# Altium PCB trottinette_telemetrie_PCB ASCII REV 2.00.PcbDoc
Units mm, origin at the board's own origin, x right, y up, seen from the top; angles counter-clockwise.
Board outline 53 x 36.25 mm, 2 copper layers (Top, Bottom), stack 1.54 mm thick; 49 components, 43 nets, 221 pads, 70 vias.
Unrouted connection lines stored in the file: 1.
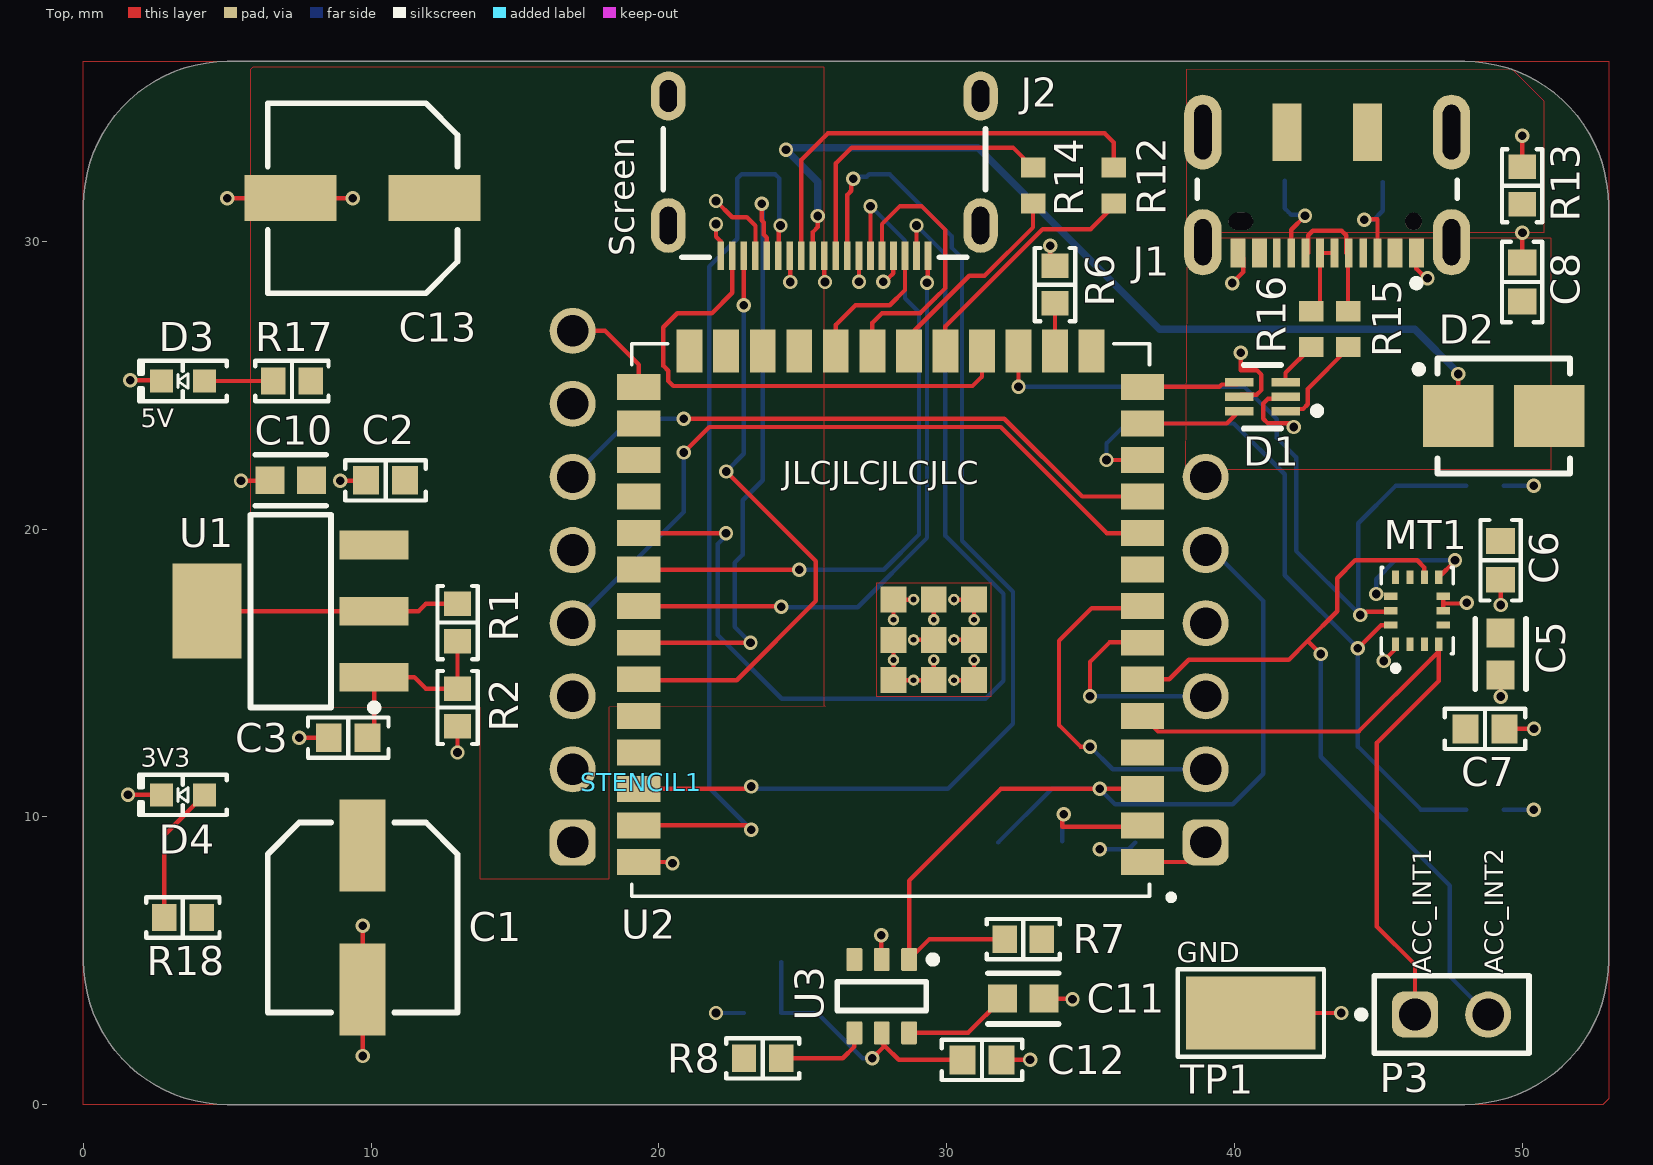
[diagram p0: Top view]
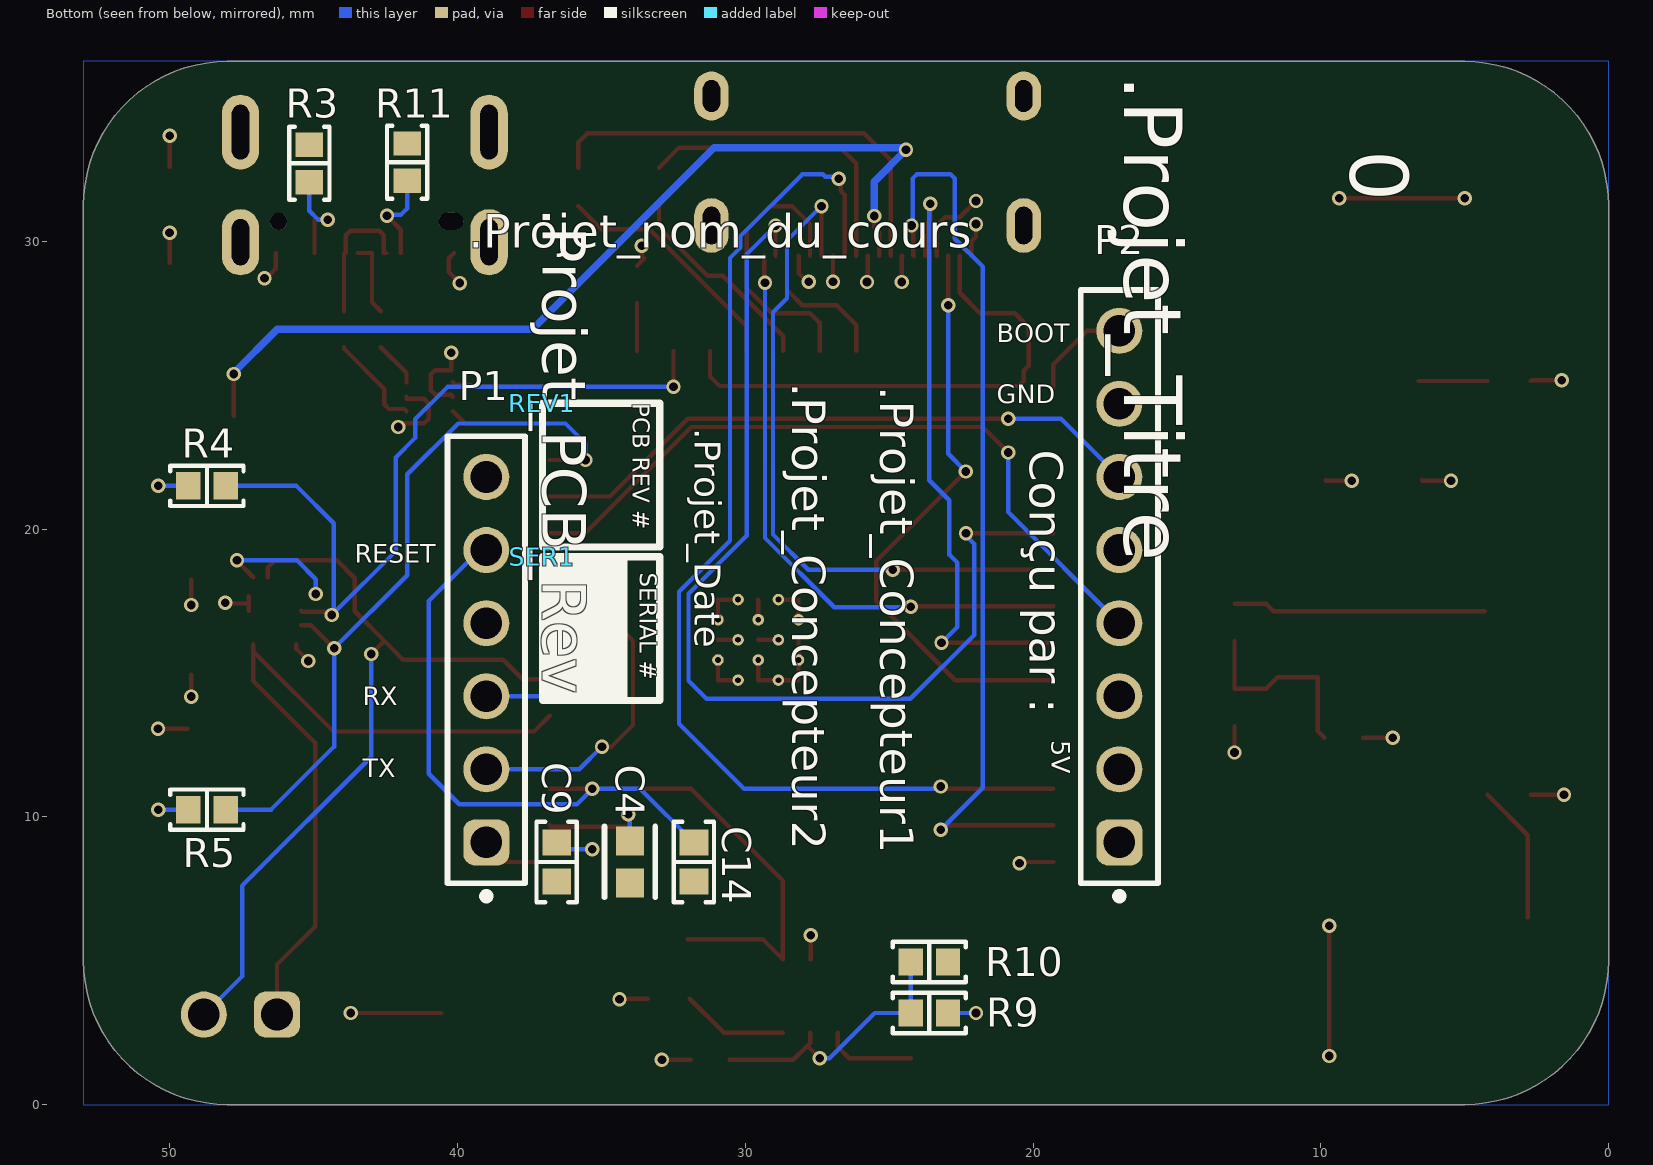
[diagram p1: Bottom view, seen from below]

## Layer stack, top to bottom
Top Solder: solder mask 0.0102, Solder Resist, Dk 3.5
Top: signal copper 0.035
Dielectric 1: core 1.47, FR-4, Dk 4.6
Bottom: signal copper 0.035
Bottom Solder: solder mask 0.0102, Solder Resist, Dk 3.5

## Board outline
0,5 0,31.25 cw(c5,31.25) 5,36.25 48,36.25 cw(c48,31.25) 53,31.25 53,5 cw(c48,5) 48,0 5,0 cw(c5,5)

## Design rules (kind name [scope] priority, off if disabled: settings)
AssemblyTestPointUsage [All] p0: scope1count=1 scope1_0_kind=Board scope1_0_value=Board scope2count=1 scope2_0_kind=Board scope2_0_value=Board commentlength=0
AssemblyTestpoint [All] p0: scope1count=1 scope1_0_kind=Board scope1_0_value=Board scope2count=1 scope2_0_kind=Board scope2_0_value=Board commentlength=0
BoardOutlineClearance [All] p0: scope1count=1 scope1_0_kind=Board scope1_0_value=Board scope2count=1 scope2_0_kind=Board scope2_0_value=Board commentlength=0 gap=0.2
BoardOutlineClearance [All] p1: gap=0.2 ignorepadtopadclearanceinfootprint=FALSE except(0: Arc-SplitContinuation Track-SplitContinuation SMDPad-SplitContinuation THPad-SplitContinuation Via-SplitContinuation Fill-SplitContinuation Poly-SplitContinuation Region-SplitContinuation Text-SplitContinuation)
Clearance [All] p0: scope1count=1 scope1_0_kind=Board scope1_0_value=Board scope2count=1 scope2_0_kind=Board scope2_0_value=Board commentlength=0 gap=0.152
Clearance [All] p1: gap=0.152 ignorepadtopadclearanceinfootprint=FALSE except(0: Arc-Hole Track-Hole SMDPad-Hole THPad-Hole Via-Hole Fill-Hole Poly-Hole Region-Hole Text-Hole; 0.127: Arc-Arc Arc-Track Track-Track SMDPad-Fill SMDPad-Poly SMDPad-Region; 0.2: Arc-SMDPad Track-SMDPad; 0.254: Arc-Via Track-Via Via-Via; 0.33: Arc-THPad Track-THPad; 0.5: THPad-THPad)
ComponentClearance [All] p0: scope1count=1 scope1_0_kind=Board scope1_0_value=Board scope2count=1 scope2_0_kind=Board scope2_0_value=Board commentlength=0 gap=0.102 collisioncheckmode=3
ComponentClearance "Schematic Component Clearance Constraint" [All] p0: scope1count=1 scope1_0_kind=Component scope1_0_value=REV1 scope2count=1 scope2_0_kind=Board scope2_0_value=Board commentlength=0 gap=0 collisioncheckmode=3
ComponentClearance "Schematic Component Clearance Constraint_1" [All] p0: scope1count=1 scope1_0_kind=Component scope1_0_value=SER1 scope2count=1 scope2_0_kind=Board scope2_0_value=Board commentlength=0 gap=0 collisioncheckmode=3
ComponentClearance "Schematic Component Clearance Constraint_1" [InComponent('SER1')] p1: gap=0 collisioncheckmode=3 verticalgap=0 showdistances=FALSE
ComponentClearance "Schematic Component Clearance Constraint" [InComponent('REV1')] p2: gap=0 collisioncheckmode=3 verticalgap=0 showdistances=FALSE
ComponentClearance [All] p3: gap=0.102 collisioncheckmode=3 verticalgap=0.102 showdistances=FALSE
DiffPairsRouting [All] p0: scope1count=1 scope1_0_kind=Board scope1_0_value=Board scope2count=1 scope2_0_kind=Board scope2_0_value=Board commentlength=0
FabricationTestPointUsage [All] p0: scope1count=1 scope1_0_kind=Board scope1_0_value=Board scope2count=1 scope2_0_kind=Board scope2_0_value=Board commentlength=0 valid=0 allowmultiple=FALSE
FabricationTestpoint [All] p0: scope1count=1 scope1_0_kind=Board scope1_0_value=Board scope2count=1 scope2_0_kind=Board scope2_0_value=Board commentlength=0 side=3 testpointundercomponent=TRUE minsize=1.016 maxsize=2.54 preferedsize=1.524 minholesize=0 maxholesize=1.016 preferedholesize=0.813 testpointgrid=0.025
FanoutControl Fanout_Default [All] p0: scope1count=1 scope1_0_kind=Board scope1_0_value=Board scope2count=1 scope2_0_kind=Board scope2_0_value=Board commentlength=30 // Fanout_Default (Default Rule)
FanoutControl Fanout_Small [All] p0 off: scope1count=1 scope1_0_kind=Board scope1_0_value=Board scope2count=1 scope2_0_kind=Board scope2_0_value=Board commentlength=84 // Protel DXP Scope 1 Expression Was: (CompPinCount < 5)   Fanout_Small (Default Rule)
FanoutControl Fanout_SOIC [All] p0 off: scope1count=1 scope1_0_kind=Board scope1_0_value=Board scope2count=1 scope2_0_kind=Board scope2_0_value=Board commentlength=71 // Protel DXP Scope 1 Expression Was: IsSOIC   Fanout_SOIC (Default Rule)
FanoutControl Fanout_LCC [All] p0 off: scope1count=1 scope1_0_kind=Board scope1_0_value=Board scope2count=1 scope2_0_kind=Board scope2_0_value=Board commentlength=69 // Protel DXP Scope 1 Expression Was: IsLCC   Fanout_LCC (Default Rule)
FanoutControl Fanout_BGA [All] p0 off: scope1count=1 scope1_0_kind=Board scope1_0_value=Board scope2count=1 scope2_0_kind=Board scope2_0_value=Board commentlength=69 // Protel DXP Scope 1 Expression Was: IsBGA   Fanout_BGA (Default Rule)
Height [All] p0: scope1count=1 scope1_0_kind=Board scope1_0_value=Board scope2count=1 scope2_0_kind=Board scope2_0_value=Board commentlength=0
HoleSize [All] p0: scope1count=1 scope1_0_kind=Board scope1_0_value=Board scope2count=1 scope2_0_kind=Board scope2_0_value=Board commentlength=0 absolutevalues=TRUE maxlimit=6.3 minlimit=0.3 maxpercent=80.000 minpercent=20.000
HoleSize [All] p1: absolutevalues=TRUE maxlimit=6.3 minlimit=0.3 maxpercent=80.000 minpercent=20.000
HoleToHoleClearance [All] p0: scope1count=1 scope1_0_kind=Board scope1_0_value=Board scope2count=1 scope2_0_kind=Board scope2_0_value=Board commentlength=0
HoleToHoleClearance [All] p1: gap=0.5 allowstackedmicrovias=FALSE
LayerPairs [All] p0: scope1count=1 scope1_0_kind=Board scope1_0_value=Board scope2count=1 scope2_0_kind=Board scope2_0_value=Board commentlength=0 enforce=TRUE
MinimumAnnularRing [All] p0: scope1count=1 scope1_0_kind=Board scope1_0_value=Board scope2count=1 scope2_0_kind=Board scope2_0_value=Board commentlength=0 minimumring=0.13
MinimumAnnularRing [All] p1: minimumring=0.13
MinimumSolderMaskSliver [All] p0: scope1count=1 scope1_0_kind=Board scope1_0_value=Board scope2count=1 scope2_0_kind=Board scope2_0_value=Board commentlength=0
MinimumSolderMaskSliver [All] p1: minsoldermaskwidth=0.1
NetAntennae [All] p0: scope1count=1 scope1_0_kind=Board scope1_0_value=Board scope2count=1 scope2_0_kind=Board scope2_0_value=Board commentlength=0
PasteMaskExpansion [All] p0: scope1count=1 scope1_0_kind=Board scope1_0_value=Board scope2count=1 scope2_0_kind=Board scope2_0_value=Board commentlength=0 expansion=0
PlaneClearance [All] p0: scope1count=1 scope1_0_kind=Board scope1_0_value=Board scope2count=1 scope2_0_kind=Board scope2_0_value=Board commentlength=0 clearance=0.152
PlaneClearance [All] p1: clearance=0.152
PlaneConnect [All] p0: scope1count=1 scope1_0_kind=Board scope1_0_value=Board scope2count=1 scope2_0_kind=Board scope2_0_value=Board commentlength=0 planeconnectstyle=Relief reliefexpansion=0.508 reliefentries=4 reliefconductorwidth=0.254 reliefairgap=0.254
PlaneConnect [All] p1: pad.planeconnectstyle=Relief pad.reliefexpansion=0.508 pad.reliefentries=4 pad.reliefconductorwidth=0.254 pad.reliefairgap=0.254 via.planeconnectstyle=Direct via.reliefexpansion=0.508 via.reliefentries=4 via.reliefconductorwidth=0.254 via.reliefairgap=0.254
PolygonConnect [All] p0: scope1count=1 scope1_0_kind=Board scope1_0_value=Board scope2count=1 scope2_0_kind=Board scope2_0_value=Board commentlength=0 connectstyle=Relief reliefconductorwidth=0.254 reliefentries=4 polygonreliefangle="90 Angle"
PolygonConnect [All] p1: thpad.connectstyle=Relief thpad.reliefconductorwidth=0.254 thpad.reliefentries=4 thpad.polygonreliefangle="90 Angle" thpad.airgapwidth=0.254 smdpad.connectstyle=Relief smdpad.reliefconductorwidth=0.254 smdpad.reliefentries=4 smdpad.polygonreliefangle="90 Angle" smdpad.airgapwidth=0.254 via.connectstyle=Direct via.reliefconductorwidth=0.254 via.reliefentries=4 via.polygonreliefangle="90 Angle" via.airgapwidth=0.254
RoutingCorners [All] p0: scope1count=1 scope1_0_kind=Board scope1_0_value=Board scope2count=1 scope2_0_kind=Board scope2_0_value=Board commentlength=0 cornerstyle=45-Degree minsetback=2.54 maxsetback=2.54
RoutingLayers [All] p0: scope1count=1 scope1_0_kind=Board scope1_0_value=Board scope2count=1 scope2_0_kind=Board scope2_0_value=Board commentlength=0 top layer=Automatic bottom layer=Automatic
RoutingPriority [All] p0: scope1count=1 scope1_0_kind=Board scope1_0_value=Board scope2count=1 scope2_0_kind=Board scope2_0_value=Board commentlength=0
RoutingTopology [All] p0: scope1count=1 scope1_0_kind=Board scope1_0_value=Board scope2count=1 scope2_0_kind=Board scope2_0_value=Board commentlength=0 topology=Shortest
RoutingVias [All] p0: scope1count=1 scope1_0_kind=Board scope1_0_value=Board scope2count=1 scope2_0_kind=Board scope2_0_value=Board commentlength=0 holewidth=0.3 width=0.5 viastyle="Through Hole" minholewidth=0.3 minwidth=0.5 maxholewidth=6.3 maxwidth=6.5
RoutingVias [All] p1: holewidth=0.3 width=0.5 viastyle="Through Hole" minholewidth=0.3 minwidth=0.5 maxholewidth=6.3 maxwidth=6.5
ShortCircuit [All] p0: scope1count=1 scope1_0_kind=Board scope1_0_value=Board scope2count=1 scope2_0_kind=Board scope2_0_value=Board commentlength=0 allowed=FALSE
SilkToBoardRegionClearance [All] p0: scope1count=1 scope1_0_kind=Board scope1_0_value=Board scope2count=1 scope2_0_kind=Board scope2_0_value=Board commentlength=0
SilkToSilkClearance [All] p0: scope1count=1 scope1_0_kind=Board scope1_0_value=Board scope2count=1 scope2_0_kind=Board scope2_0_value=Board commentlength=0
SilkToSilkClearance [All] p1: silktosilkclearance=0.102
SilkToSolderMaskClearance [All] p0 off: scope1count=1 scope1_0_kind=Board scope1_0_value=Board scope2count=1 scope2_0_kind=Board scope2_0_value=Board commentlength=44 // Protel DXP Scope 1 Expression Was: IsPad
SilkToSolderMaskClearance [IsPad] p1: minsilkscreentomaskgap=0.024 clearancetoexposedcopper=FALSE
SolderMaskExpansion [All] p0: scope1count=1 scope1_0_kind=Board scope1_0_value=Board scope2count=1 scope2_0_kind=Board scope2_0_value=Board commentlength=0 expansion=0.051
SolderMaskExpansion SolderMaskExpansion_Via [All] p0 off: scope1count=1 scope1_0_kind=Board scope1_0_value=Board scope2count=1 scope2_0_kind=Board scope2_0_value=Board commentlength=44 expansion=0.102 // Protel DXP Scope 1 Expression Was: isVia
SolderMaskExpansion SolderMaskExpansion_Via [isVia] p1: expansion=0.102 istentingtop=TRUE
SolderMaskExpansion [All] p2: expansion=0.051 istentingtop=FALSE
SupplyNets "Schematic Supply Nets_3" [All] p0: scope1count=1 scope1_0_kind=Net scope1_0_value=3V3 scope2count=1 scope2_0_kind=Board scope2_0_value=Board commentlength=0 voltage=0.000
SupplyNets "Schematic Supply Nets_2" [All] p0: scope1count=1 scope1_0_kind=Net scope1_0_value=GND scope2count=1 scope2_0_kind=Board scope2_0_value=Board commentlength=0 voltage=0.000
SupplyNets "Schematic Supply Nets_1" [All] p0: scope1count=1 scope1_0_kind=Net scope1_0_value=VBUS scope2count=1 scope2_0_kind=Board scope2_0_value=Board commentlength=0 voltage=0.000
SupplyNets "Schematic Supply Nets" [All] p0: scope1count=1 scope1_0_kind=Net scope1_0_value=5V0 scope2count=1 scope2_0_kind=Board scope2_0_value=Board commentlength=0 voltage=0.000
SupplyNets "Schematic Supply Nets_3" [InNet('3V3')] p1: voltage=0.000
SupplyNets "Schematic Supply Nets_2" [InNet('GND')] p2: voltage=0.000
SupplyNets "Schematic Supply Nets_1" [InNet('VBUS')] p3: voltage=0.000
SupplyNets "Schematic Supply Nets" [InNet('5V0')] p4: voltage=0.000
UnRoutedNet [All] p0: scope1count=1 scope1_0_kind=Board scope1_0_value=Board scope2count=1 scope2_0_kind=Board scope2_0_value=Board commentlength=0
UnpouredPolygon [All] p0: scope1count=1 scope1_0_kind=Board scope1_0_value=Board scope2count=1 scope2_0_kind=Board scope2_0_value=Board commentlength=0
Width [All] p0: scope1count=1 scope1_0_kind=Board scope1_0_value=Board scope2count=1 scope2_0_kind=Board scope2_0_value=Board commentlength=0 maxlimit=25.4 minlimit=0.127 preferedwidth=0.152
Width [All] p1: maxlimit=25.4 minlimit=0.127 preferedwidth=0.152 minimp=50.000000 maximp=50.000000 favimp=50.000000
22 further rules are at their usual default settings.

## Classes and differential pairs
component class Trottinette_Telemetrie_overview: STENCIL1
component class Trottinette_Telemetrie_Connectors: C8 C13 D1 D2 J1 J2 P1 P2 R3 R11 R13 R15 R16
component class Trottinette_Telemetrie_Circuit: C1 C2 C3 C4 C5 C6 C7 C9 C10 C11 C12 C14 D3 D4 MT1 P3 R1 R2 R4 R5 R6 R7 R8 R9 R10 R12 R14 R17 R18 TP1 U1 U2 U3
component class Trottinette_Telemetrie_Title: REV1 SER1

## Components (designator, comment, footprint, x,y, rotation, side; value= is the part's Value field where it differs from the comment)
C1 "100 µF" "CAP ALSMD 6.6MM H6.1MM" 9.7,6.5 r270 top
C2 "10 µF" "CAP 0603_1608" 10.499,21.695 r0 top
C3 "10 µF" "CAP 0603_1608" 9.2,12.75 r0 top
C4 "0603ZC104MAT2A" FP-0603-L_1_6_0_15-W_0_81-IPC_B 34.01,8.43 r270 bottom
C5 "0603ZC104MAT2A" FP-0603-L_1_6_0_15-W_0_81-IPC_B 49.25,15.658 r270 top
C6 "10000 pF" "CAP 0603_1608" 49.25,18.914 r90 top
C7 "2.2 µF" "CAP 0603_1608" 48.711,13.054 r180 top
C8 "10 µF" "CAP 0603_1608" 50,28.586 r270 top
C9 "10 µF" "CAP 0603_1608" 36.555,8.43 r90 bottom
C10 "0603ZC104MAT2A" FP-0603-L_1_6_0_15-W_0_81-IPC_B 7.2,21.695 r180 top
C11 "0603ZC104MAT2A" FP-0603-L_1_6_0_15-W_0_81-IPC_B 32.66,3.681 r0 top
C12 "10000 pF" "CAP 0603_1608" 31.225,1.553 r180 top
C13 "100 µF" "CAP ALSMD 6.6MM H6.1MM" 9.7,31.498 r180 top
C14 "10 µF" "CAP 0603_1608" 31.785,8.43 r90 bottom
D1 "USBLC6-2P6" FP-SOT-666-MFG 40.971,24.599 r180 top
D2 "LSM115JE3/TR13" DIOM4336X33N 49.359,23.93 r0 top
D3 "Green" "LED 0603_1608 GREEN" 3.455,25.146 r180 top
D4 "Yellow" "LED 0603_1608 YELLOW" 3.455,10.763 r180 top
J1 "DX07S016JA1R1500" FP-DX07S016JA1R1500-MFG 43.223,32.795 r180 top
J2 "685119136923" 685119136923 25.75,33.25 r180 top
MT1 "ICM-42670-P" XDCR_ICM-42670-P 46.35,17.164 r90 top
P1 "61300611121" 61300611121 39,15.46 r90 bottom
P2 "61300811121" 61300811121 17,18 r90 bottom
P3 "61300211121" 61300211121 47.545,3.127 r0 top
R1 "150 Ohms" "RES 0603_1608" 13,16.75 r90 top
R2 "250 Ohms" "RES 0603_1608" 13,13.797 r90 top
R3 "5.1 k" "RES 0603_1608" 45.15,32.71 r270 bottom
R4 "10k" "RES 0603_1608" 48.711,21.5 r0 bottom
R5 "10k" "RES 0603_1608" 48.711,10.25 r0 bottom
R6 "10k" "RES 0603_1608" 33.765,28.496 r270 top
R7 "124 k" "RES 0603_1608" 32.66,5.75 r0 top
R8 "124 k" "RES 0603_1608" 23.605,1.607 r180 top
R9 "63.4 k" "RES 0603_1608" 23.605,3.181 r180 bottom
R10 "10k" "RES 0603_1608" 23.605,4.955 r0 bottom
R11 "5.1 k" "RES 0603_1608" 41.75,32.75 r270 bottom
R12 "ERJ3EKF30R0V" RESC1608X55X30LL15T15 35.805,31.935 r90 top
R13 "0 Ohms" "RES 0603_1608" 50,31.935 r90 top
R14 "ERJ3EKF30R0V" RESC1608X55X30LL15T15 33,31.935 r90 top
R15 "ERJ3EKF30R0V" RESC1608X55X30LL15T15 43.948,26.947 r270 top
R16 "ERJ3EKF30R0V" RESC1608X55X30LL15T15 42.666,26.947 r270 top
R17 "1 kOhms" "RES 0603_1608" 7.243,25.146 r180 top
R18 "1 kOhms" "RES 0603_1608" 3.455,6.5 r180 top
REV1 "Revision Cartridge Mini" REV_REVISION_CARTRIDGE_MINI 37.05,24.374 r270 bottom
SER1 "Serial Cartridge MICRO" SER_SERIAL_CARTRIDGE_MICRO 37.05,19.041 r270 bottom
STENCIL1 "STN_STENCIL_TOP_PASTE_181x280" STN_STENCIL_TOP_PASTE_181x280 19.38,11.208 r0 top
TP1 "TPO_SMD_5019" TPO_SMD_5019 40.573,3.181 r0 top
U1 "LM1117MPX-ADJ" MP04A_N 7.2,17.147 r180 top
U2 "ESP32-S3-WROOM-1U-N16R8" XCVR_ESP32-S3-WROOM-1U-N16R8 28.05,16.84 r180 top
U3 "TPS3808G01DBVR" DBV0006A_L 27.742,3.766 r270 top

## Footprints (in the part's own frame and the unit in brackets; to place one, negate y for a bottom-side part, rotate by r counter-clockwise, add the part's x,y. Pads: shape width x height; smd on the part's side, far side on the other; paste and mask are expansions set on the pad)
61300211121 [mm] "Pin Header, pitch 2.54 mm, THT, Vertical, single row, 2p"
  rrect50% 1.6x1.6 hole 1.1: 1(-1.27,0)
  round 1.6 hole 1.1: 2(1.27,0)
  silkscreen extent -3.26,-1.35 2.69,1.35
61300611121 [mm] "Pin Header, pitch 2.54 mm, THT, Vertical, single row, 6p"
  rrect50% 1.6x1.6 hole 1.1: 1(-6.35,0)
  round 1.6 hole 1.1: 2(-3.81,0) 3(-1.27,0) 4(1.27,0) 5(3.81,0) 6(6.35,0)
  silkscreen extent -8.34,-1.35 7.77,1.35
61300811121 [mm] "Pin Header, pitch 2.54 mm, THT, Vertical, single row, 8p"
  rrect50% 1.6x1.6 hole 1.1: 1(-8.89,0)
  round 1.6 hole 1.1: 2(-6.35,0) 3(-3.81,0) 4(-1.27,0) 5(1.27,0) 6(3.81,0) 7(6.35,0) 8(8.89,0)
  silkscreen extent -10.88,-1.35 10.31,1.35
685119136923 [mm] "Mini HDMI SMT Horizontal"
  rect 0.23x1 smd: 1(3.6,3.75) 2(3.2,3.75) 3(2.8,3.75) 4(2.4,3.75) 5(2,3.75) 6(1.6,3.75) 7(1.2,3.75) 8(0.8,3.75) 9(0.4,3.75) 10(0,3.75) 11(-0.4,3.75) 12(-0.8,3.75) 13(-1.2,3.75) 14(-1.6,3.75) 15(-2,3.75) 16(-2.4,3.75) 17(-2.8,3.75) 18(-3.2,3.75) 19(-3.6,3.75)
  oval 1.2x1.7 hole 0.6 slot 1.1 at 90 deg: Shell(-5.425,-1.8) Shell(5.425,-1.8)
  oval 1.2x1.9 hole 0.6 slot 1.3 at 90 deg: Shell(-5.425,2.7) Shell(5.425,2.7)
  silkscreen extent -5.6,-0.65 5.6,3.8
"CAP 0603_1608" [mm] "Chip Capacitor, 2-Leads, Body 1.60x0.80mm, IPC Medium Density"
  rect 0.9x1 smd: 1(-0.675,0) 2(0.675,0)
  silkscreen extent -1.4,-0.7 1.4,0.7
"CAP ALSMD 6.6MM H6.1MM" [mm] "Aluminum Electrolytic Capacitor, Body 6.60x6.60x6.10mm, IPC Low Density"
  rect 3.2x1.6 smd: 1(-2.5,0) 2(2.5,0)
  silkscreen extent -3.3,-3.3 3.3,3.3
DBV0006A_L [mm] "SOT23, 6-Leads, Body 3.05x1.75mm, Pitch 0.95mm, IPC High Density"
  rrect18% 0.8x0.55 smd: 1(-1.275,0.95) 2(-1.275,0) 3(-1.275,-0.95) 4(1.275,-0.95) 5(1.275,0) 6(1.275,0.95)
  silkscreen extent -1.4,-1.55 0.5,1.9
DIOM4336X33N [mm] "Molded Diode, 2-Leads, Body 4.31x3.62mm, IPC Medium Density"
  rect 2.45x2.15 smd: 1(-1.575,0) 2(1.575,0)
  silkscreen extent -3.07,-2 2.3,2
FP-0603-L_1_6_0_15-W_0_81-IPC_B [mm]
  rect 1.007x0.968 smd paste+0 mask+0: 1(-0.726,0) 2(0.726,0)
  silkscreen extent -1.23,-0.88 1.23,0.88
FP-DX07S016JA1R1500-MFG [mm]
  rrect100% 1.3x2.3 hole 1.6 slot 0.6 at 0 deg paste+0 mask+0: 1(-4.32,2.825) 2(4.32,2.825)
  rrect100% 1.3x2.6 hole 1.9 slot 0.6 at 0 deg paste+0 mask+0: 3(-4.32,-1) 6(4.32,-1)
  rect 1x2 smd paste+0 mask+0: 4(-1.4,-1) 5(1.4,-1)
  rect 0.52x1 smd paste+0 mask+0: A1/B12(-3.1,3.2) A4/B9(-2.35,3.2) A12/B1(3.1,3.2) B4/A9(2.35,3.2)
  rect 0.27x1 smd paste+0 mask+0: A5(-1.75,3.2) A6(-0.25,3.2) A7(0.75,3.2) A8(1.75,3.2) B5(1.25,3.2) B6(0.25,3.2) B7(-0.75,3.2) B8(-1.25,3.2)
  round 0.6 hole 0.6 unplated paste+0 mask+0: ""(-3,2.1)
  rrect100% 0.85x0.6 hole 0.6 slot 0.85 at 0 deg unplated paste+0 mask+0: ""(3,2.1)
  silkscreen extent -4.52,0.68 4.52,4.37
FP-SOT-666-MFG [mm]
  rect 0.99x0.3 smd paste+0 mask+0: 1(-0.805,0.5) 2(-0.805,0) 3(-0.805,-0.5) 4(0.805,-0.5) 5(0.805,0) 6(0.805,0.5)
  silkscreen extent -2.02,-1.1 0.65,1.1
"LED 0603_1608 GREEN" [mm] "Chip Diode, 2-Leads, Body 1.60x0.80mm, IPC Medium Density"
  rect 0.8x0.8 smd: 1(-0.75,0) 2(0.75,0)
  silkscreen extent -1.52,-0.7 1.52,0.7
"LED 0603_1608 YELLOW" [mm] "Chip Diode, 2-Leads, Body 1.60x0.80mm, IPC Medium Density"
  rect 0.8x0.8 smd: 1(-0.75,0) 2(0.75,0)
  silkscreen extent -1.52,-0.7 1.52,0.7
MP04A_N [mm] "SOT223, 4-Leads, Body 6.5x3.5mm, Pitch 2.3mm, Lead Span 7mm, IPC Medium Density"
  rect 2.4x1 smd: 1(-2.9,2.3) 2(-2.9,0) 3(-2.9,-2.3)
  rect 2.4x3.3 smd: 4(2.9,0)
  silkscreen extent -3.03,-3.35 1.4,3.47
"RES 0603_1608" [mm] "Chip Resistor, 2-Leads, Body 1.60x0.80mm, IPC Medium Density"
  rect 0.85x0.95 smd: 1(-0.65,0) 2(0.65,0)
  silkscreen extent -1.27,-0.7 1.27,0.7
RESC1608X55X30LL15T15 [mm] "Chip Resistor, 2-Leads, Body 1.60x0.80mm, IPC High Density"
  rect 0.7x0.85 smd: 1(-0.625,0) 2(0.625,0)
REV_REVISION_CARTRIDGE_MINI [mm]
  silkscreen extent 0,0 5,4.08
SER_SERIAL_CARTRIDGE_MICRO [mm]
  silkscreen extent 0,0 5.02,4.08
STN_STENCIL_TOP_PASTE_181x280 [mm]
TPO_SMD_5019 [mm] "PC TEST POINT MINI SMD"
  rect 4.5x2.53 smd paste-5 mask+0: 1(0,0)
  silkscreen extent -2.54,-1.52 2.54,1.52
XCVR_ESP32-S3-WROOM-1U-N16R8 [mm]
  rect 1.5x0.9 smd: 1(-8.75,8.41) 2(-8.75,7.14) 3(-8.75,5.87) 4(-8.75,4.6) 5(-8.75,3.33) 6(-8.75,2.06) 7(-8.75,0.79) 8(-8.75,-0.48) 9(-8.75,-1.75) 10(-8.75,-3.02) 11(-8.75,-4.29) 12(-8.75,-5.56) 13(-8.75,-6.83) 14(-8.75,-8.1) 27(8.75,-8.1) 28(8.75,-6.83) 29(8.75,-5.56) 30(8.75,-4.29) 31(8.75,-3.02) 32(8.75,-1.75) 33(8.75,-0.48) 34(8.75,0.79) 35(8.75,2.06) 36(8.75,3.33) 37(8.75,4.6) 38(8.75,5.87) 39(8.75,7.14) 40(8.75,8.41)
  rect 0.9x1.5 smd: 15(-6.985,-9.35) 16(-5.715,-9.35) 17(-4.445,-9.35) 18(-3.175,-9.35) 19(-1.905,-9.35) 20(-0.635,-9.35) 21(0.635,-9.35) 22(1.905,-9.35) 23(3.175,-9.35) 24(4.445,-9.35) 25(5.715,-9.35) 26(6.985,-9.35)
  rect 0.9x0.9 smd: 41_1(-2.9,2.09) 41_2(-1.5,2.09) 41_3(-0.1,2.09) 41_4(-2.9,0.69) 41_5(-1.5,0.69) 41_6(-0.1,0.69) 41_7(-2.9,-0.71) 41_8(-1.5,-0.71) 41_9(-0.1,-0.71)
  round 0.4 hole 0.2 mask+0: 41_10(-2.2,2.09) 41_11(-0.8,2.09) 41_12(-2.9,1.39) 41_13(-1.5,1.39) 41_14(-0.1,1.39) 41_15(-2.2,0.69) 41_16(-0.8,0.69) 41_17(-2.9,-0.01) 41_18(-1.5,-0.01) 41_19(-0.1,-0.01) 41_20(-2.2,-0.71) 41_21(-0.8,-0.71)
  silkscreen extent -9.85,-9.6 9,9.74
XDCR_ICM-42670-P [mm]
  rect 0.475x0.25 smd paste-1 mask+0: 1(-1.162,0.75) 2(-1.162,0.25) 3(-1.162,-0.25) 4(-1.162,-0.75) 8(1.163,-0.75) 9(1.163,-0.25) 10(1.163,0.25) 11(1.163,0.75)
  rect 0.25x0.475 smd paste-1 mask+0: 5(-0.5,-0.913) 6(0,-0.913) 7(0.5,-0.913) 12(0.5,0.912) 13(0,0.912) 14(-0.5,0.912)
  silkscreen extent -2.1,-1.25 1.5,1.25

## Part data
C1 C13: library part 10SGV100M6.3X6.1, "CAP ALUM 100UF 20% 10V SMD"
C2 C3 C8 C9 C14: library part GRT188R61A106KE13D, "CAP CER 10UF 10V X5R 0603"
C4 C5 C10 C11: library part CMP-2006-04550-2, "General Purpose Ceramic Capacitor, 0603, 100nF, 20%, X7R, 15%, 10V"
C6: library part C0603C103K4RECAUTO, "CAP CER 0603 10NF 16V X7R 10%"
C7: library part CC0603ZRY5V7BB225, "CAP CER 2.2UF 16V Y5V 0603"
C12: library part AC0603KRX7R0BB103, "CAP CER 10000PF 100V X7R 0603"
D1: library part CMP-12225-000058-1, "TVS DIODE 5.25V 17V SOT666"
D2: library part CMP-362-000004-1, "DIODE SCHOTTKY 15V 1A DO214BA"
D3: library part 5973316507F, "LED GREEN 0603 SMD"
D4: library part 5990040007F, "LED YELLOW 0603 SMD"
J1: library part CMP-19038-000003-1, "CONN RCP USB2.0 TYP C 24P SMD RA"
J2: library part CMP-1502-00171-2
P1: "WR-PHD Pin Header, THT, Vertical, pitch 2.54mm, 1 Row, 6P"
P2: "WR-PHD Pin Header, THT, Vertical, pitch 2.54mm, 1 Row, 8P"
P3: "WR-PHD Pin Header, THT, Vertical, pitch 2.54mm, 1 Row, 2P"
R1: library part RMCF0603FT150R, "RES 150 OHM 1% 1/10W 0603"
R2: library part CH0603-250RJNTA, "RES 250 OHM 5% 1/8W 0603"
R3 R11: library part RMCF0603FT5K10, "RES 5.1K OHM 1% 1/10W 0603"
R4 R5 R6 R10: library part RNCS0603BKE10K0, "RES 10K OHM 0.1% 1/16W 0603"
R7 R8: library part RMCF0603FT124K, "RES 124K OHM 1% 1/10W 0603"
R9: library part RMCF0603FT63K4, "RES 63.4K OHM 1% 1/10W 0603"
R12 R14 R15 R16: library part CMP-2000-00423-1
R13: library part JR0603X26E, "0603 26 AMP JUMPER"
R17 R18: library part CPF0603B1K0E, "RES SMD 1K OHM 0.1% 1/16W 0603"
REV1: library part REV_REVISION_CARTRIDGE_MINI, "REV - REVISION CARTRIDGE MINI"
SER1: library part SER_SERIAL_CARTRIDGE_MICRO, "SER - SERIAL CARTRIDGE MICRO"
STENCIL1: library part CMP-535-000002-8, "MEC - STENCIL TOP PASTE - 181x280"
TP1: library part CMP-007-000000-1, "TPO - PC TEST POINT MINI - SMD"
U1: library part CMP-0062-01642-3, "800mA Low-Dropout Linear Regulator, 4-pin SOT-223"
U2: "Bluetooth, WiFi 802.11b/g/n, Bluetooth v5.0 Transceiver Module 2.4GHz Antenna Not Included, U.FL Surface Mount"
U3: library part CMP-0332-00558-2, "Low Quiescent Current, Programmable-Delay Supervisory Circuit, 1 Supply Monitored, -40 to 125 degC, 6-pin SOT-23 (DBV), Green (RoHS & no Sb/Br)"

## Via types
v1: diameter 0.5, hole 0.3, Top to Bottom, tented both sides, 70 vias

## Nets (pads, with @x,y where several pads share a name; then routed paths per layer and width w, separated by ;. In a path a pad name is that pad's centre, name@x,y a point inside that pad or via, vN(x,y) a via of type N, cw(c..) or ccw(c..) an arc to the next point about the centre after c; other vN are vias at no path point)
3V3: C1.1 C4.1 C5.1 C6.2 C7.2 C9.2 C11.1 MT1.5 MT1.8 MT1.12 R1.2 R4.2 R5.2 R7.2 R8.2 R9.2 R18.1 U1.2 U1.4 U2.2 U3.6 | length 25.5
  Top w0.152: U1.4 U1.2 11.647,17.147 11.9,17.4 R1.2 ; U3.6 30.744,2.491 C11.1 ; v1(34.069,10.083) 34.011,10.024 34.011,9.659 36.759,9.659 U2.2 ; MT1.8 47.665,18.892 v1(47.665,18.914)
  Bottom w0.152: v1(21.983,3.181) R9.2 ; C4.1 34.01,10.024 v1(34.069,10.083) ; v1(35.322,8.873) 36.323,8.873 C9.2 ; v1@44.884,17.703 v1(44.925,17.744) 44.925,18.258 45.581,18.914 v1(47.665,18.914) ; R5.2 v1(50.4,10.25) ; R4.2 v1(50.4,21.5)
5V0: C2.2 C10.1 C13.1 D2.1 J2.9 P2.1 P2.2 R17.1 U1.3 | length 32.3
  Top w0.152: J2.9 25.35,30.326 25.521,30.497 v1(25.521,30.881) ; D2.1 v1(47.784,25.391)
  Bottom w0.254: v1(25.521,30.881) 25.521,32.071 v1(24.414,33.178) 24.486,33.25 31.09,33.25 37.393,26.947 46.261,26.947 47.784,25.424 v1(47.784,25.391)
\RESET: C14.2 P1.5 R7.1 U2.3 U3.1 | length 36.1
  Top w0.152: R7.1 29.402,5.75 U3.1 28.692,7.781 31.881,10.97 U2.3 35.854,10.97
  Bottom w0.152: C14.2 33.65,10.97 v1(35.322,10.97) 35.852,10.44 39.94,10.44 41,11.5 41,17.5 39.23,19.27 P1.5
ACC_INT1: MT1.4 P3.1 U2.5 | length 26.2
  Top w0.152: U2.5 37.344,12.966 37.664,12.966 37.667,12.964 44.315,12.964 46.839,15.488 47.1,15.749 MT1.4 47.1,14.719 44.949,12.568 44.949,6.189 46.275,4.863 P3.1
ACC_INT2: MT1.9 P3.2 U2.6 | length 28.2
  Top w0.152: U2.6 37.73,14.78 38.41,15.46 41.892,15.46 42.525,16.093 ; v1(43,15.658) 42.565,16.093 42.525,16.093 ; MT1.9 46.6,18.664 46.35,18.914 44.192,18.914 43.572,18.294 43.572,17.14 42.525,16.093
  Bottom w0.152: v1(43,15.658) 43,12.089 47.489,7.601 47.489,4.453 P3.2
BOOT: P2.8 U2.27 | length 3.6
  Top w0.152: P2.8 18.125,26.89 19.3,25.715 U2.27
CON_GPIO18: P2.4 U2.10 | length 25.4
  Top w0.152: v1(20.862,22.659) 21.75,23.548 31.877,23.548 35.565,19.86 U2.10
  Bottom w0.152: P2.4 20.862,20.592 v1(20.862,22.659)
CON_GPIO21: P2.6 U2.11 | length 21.8
  Top w0.152: v1(20.862,23.838) 32.002,23.838 34.709,21.13 U2.11
  Bottom w0.152: P2.6 19.028,23.838 v1(20.862,23.838)
DC_PIN: J2.5 U2.34 | length 21.7
  Top w0.152: U2.34 v1(23.179,16.05) ; v1(23.57,31.31) 23.57,30.73 23.644,30.656 23.644,30.236 23.75,30.129 J2.5
  Bottom w0.152: v1(23.179,16.05) 22.627,16.602 22.627,18.83 22.91,19.114 22.91,21 23.605,21.695 23.605,31.275 v1(23.57,31.31)
GND: C1.2 C2.1 C3.1 C4.2 C5.2 C6.1 C7.1 C8.1 C9.1 C10.2 C11.2 C12.1 C13.2 C14.1 D1.2 D3.2 D4.2 J1.A1/B12 J1.A12/B1 J2.1 J2.4 J2.7 J2.10 J2.13 J2.16 J2.Shell MT1.1 MT1.6 MT1.7 P1.1 P1.4 P1.6 P2.3 P2.5 P2.7 R2.1 R3.1 R6.1 R10.1 R11.1 R13.2 TP1.1 U2.1 U2.40 U2.41_1 U2.41_2 U2.41_3 U2.41_4 U2.41_5 U2.41_6 U2.41_7 U2.41_8 U2.41_9 U2.41_10 U2.41_11 U2.41_12 U2.41_13 U2.41_14 U2.41_15 U2.41_16 U2.41_17 U2.41_18 U2.41_19 U2.41_20 U2.41_21 U3.2 | length 54.9
  Top w0.152: v1(1.545,10.763) D4.2 ; v1(1.625,25.175) 2.676,25.175 D3.2 ; v1(5,31.498) C13.2 v1(9.359,31.498) ; v1(5.473,21.684) 6.463,21.684 C10.2 ; v1(7.5,12.75) C3.1 ; v1(8.927,21.684) 9.814,21.684 C2.1 ; v1(9.7,1.687) C1.2 v1(9.7,6.208) ; v1(13,12.235) R2.1 ; U2.40 20.421,8.43 v1(20.471,8.38) ; v1(21.983,30.6) 21.983,30.163 22.15,29.996 J2.1 ; v1(21.983,31.4) 22.543,30.84 23.057,30.84 23.356,30.541 23.356,29.961 23.35,29.955 J2.4 ; J2.7 24.559,29.491 24.559,28.886 24.564,28.881 v1(24.564,28.586) ; J2.10 25.75,28.605 v1(25.769,28.586) ; v1(26.95,28.598) J2.13 ; v1(27.728,5.884) 27.728,5.055 U3.2 ; v1(27.798,28.598) 27.924,28.724 27.979,28.724 28.141,28.886 28.141,29.491 J2.16 ; U2.41_6 U2.41_3 U2.41_2 U2.41_13 ; U2.41_19 U2.41_9 U2.41_21 ; U2.41_16 U2.41_5 ; U2.41_18 U2.41_8 ; U2.41_10 U2.41_1 U2.41_12 ; U2.41_15 U2.41_4 ; U2.41_20 U2.41_7 U2.41_17 ; C12.1 31.905,1.558 v1(32.897,1.558) ; C11.2 34.347,3.681 v1(34.372,3.656) ; v1(33.6,29.846) 33.6,29.491 33.51,29.401 R6.1 ; U2.1 38.32,8.43 P1.1 ; v1(39.924,28.55) 40.307,28.932 40.307,29.411 J1.A12/B1 ; TP1.1 v1(43.717,3.181) ; D1.2 41.776,24.525 41.167,24.525 41.005,24.364 41.005,23.835 41.167,23.673 42.033,23.673 42.057,23.649 v1(42.057,23.547) ; v1(45.184,15.414) 45.6,15.831 MT1.1 ; J1.A1/B12 46.323,29.048 46.652,28.72 v1(46.71,28.72) ; MT1.6 47.262,17.414 ; MT1.7 47.262,17.414 ; v1(48.07,17.44) 48.045,17.414 47.262,17.414 ; v1(49.25,14.179) C5.2 ; v1(49.25,17.36) C6.1 ; C7.1 v1(50.411,13.054) ; C8.1 50,30.294 v1(50.009,30.302) ; R13.2 v1(50,33.667)
GPIO1: J2.6 U2.39 | length 31.9
  Top w0.152: U2.39 23.057,9.7 v1(23.207,9.55) ; J2.6 24.159,29.509 24.159,30.485 v1(24.224,30.55)
  Bottom w0.152: v1(23.207,9.55) 21.75,11.007 21.75,29.122 22.721,30.092 22.721,32.185 22.871,32.335 24.035,32.335 24.185,32.185 24.185,30.589 v1(24.224,30.55)
GPIO38: J2.18 U2.31 | length 35.9
  Top w0.152: U2.31 v1(22.33,19.86) ; J2.18 v1(28.95,30.55)
  Bottom w0.152: v1(22.33,19.86) 22.33,19.766 22.047,19.483 22.047,16.318 24.264,14.1 31.35,14.1 31.975,14.725 31.975,17.75 29.955,19.77 29.955,29.545 v1(28.95,30.55)
GPIO39: J2.14 U2.32 | length 24.1
  Top w0.152: U2.32 v1(24.875,18.59) ; J2.14 v1(27.35,31.225)
  Bottom w0.152: v1(24.875,18.59) 27.816,18.59 29.035,19.809 29.035,27.536 28.55,28.022 28.55,30.025 v1(27.35,31.225)
I2C_SCL: MT1.13 R4.1 U2.17 | length 27.2
  Top w0.152: v1(32.495,24.94) U2.17 ; v1(44.37,17.013) 44.464,17.013 44.574,17.123 45.396,17.123 MT1.13
  Bottom w0.152: v1(32.495,24.94) 40.351,24.94 41.477,23.814 41.477,23.165 42.142,22.499 42.142,19.241 v1@44.304,17.08 ; v1(44.37,17.013) v1@44.304,17.08 ; R4.1 45.6,21.5 44.304,20.204 44.304,17.39 v1@44.304,17.08
I2C_SDA: MT1.14 R5.1 U2.12 | length 25.7
  Top w0.152: v1(35.555,22.4) U2.12 ; v1(44.29,15.857) 45.094,16.661 45.434,16.661 MT1.14
  Bottom w0.152: v1(35.555,22.4) 35.555,22.977 36.248,23.67 39.98,23.67 41.748,21.901 41.748,18.399 v1(44.29,15.857) 44.29,12.441 46.481,10.25 R5.1
LED_CONTROL: J2.12 U2.38 | length 39
  Top w0.152: U2.38 23.123,10.97 v1(23.207,11.055) ; J2.12 26.55,31.622 26.686,31.758 26.686,32.11 v1(26.752,32.177)
  Bottom w0.152: v1(23.207,11.055) 23.292,10.97 30.04,10.97 32.303,13.233 32.303,17.5 32.303,17.817 30.53,19.59 30.53,29.422 30.169,29.783 30.169,30.181 28.015,32.335 27.307,32.335 27.215,32.243 26.819,32.243 v1(26.752,32.177)
MCU_RX: P1.3 U2.7 | length 7.3
  Top w0.152: v1(34.98,14.19) 34.98,15.383 35.657,16.06 36.79,16.06 U2.7
  Bottom w0.152: v1(34.98,14.19) P1.3
MCU_TX: P1.2 U2.8 | length 12.1
  Top w0.152: v1(34.98,12.441) 34.65,12.441 33.904,13.187 33.904,16.116 35.035,17.247 36.727,17.247 U2.8
  Bottom w0.152: v1(34.98,12.441) 35.771,11.65 P1.2
NetC3_2: C3.2 R1.1 R2.2 U1.1 | length 6.9
  Top w0.152: C3.2 10.1,12.975 U1.1 11.5,14.847 11.9,14.447 R2.2 R1.1
NetC12_2: C12.2 R9.1 R10.2 U3.5 | length 9.6
  Top w0.152: v1(27.415,1.607) 27.824,2.016 27.868,2.016 ; U3.5 27.742,2.142 27.868,2.016 ; C12.2 28.331,1.553 27.868,2.016
  Bottom w0.152: R10.2@24.255,4.955 R9.1 25.5,3.181 27.074,1.607 v1(27.415,1.607)
NetD1_1: D1.1 R15.2 | length 3.4
  Top w0.152: D1.1 41.85,24.173 42.385,24.173 42.547,24.335 42.547,24.864 42.544,24.867 43.948,26.271 R15.2
NetD1_3: D1.3 R16.2 | length 1.6
  Top w0.152: D1.3 41.776,25.432 R16.2
NetD3_1: D3.1 R17.2 | length 2.4
  Top w0.152: D3.1 R17.2
NetD4_1: D4.1 R18.2 | length 4.8
  Top w0.152: R18.2 2.805,9.363 D4.1
NetJ1_1: J1.1 J1.2 J1.3 J1.4 J1.5 J1.6 R13.1
NetJ1_A5: J1.A5 R3.2 | length 3.4
  Top w0.152: v1(44.51,30.746) 44.53,30.765 44.973,30.765 J1.A5
  Bottom w0.152: v1(44.51,30.746) 44.833,30.746 45.15,31.063 R3.2
NetJ1_A6: J1.A6 J1.B6 R16.1 | length 2.7
  Top w0.152: R16.1 42.973,27.879 J1.B6 J1.A6
NetJ1_A7: J1.A7 J1.B7 R15.1 | length 4.8
  Top w0.152: J1.A7 42.562,29.595 42.562,30.209 42.724,30.371 43.223,30.371 ; 43.224,30.371 43.723,30.371 43.884,30.209 43.884,29.595 43.923,29.595 43.948,29.57 R15.1
NetJ1_B5: J1.B5 R11.2 | length 3.2
  Top w0.152: J1.B5 41.973,30.406 v1(42.451,30.883)
  Bottom w0.152: R11.2 41.75,31.145 41.892,31.003 41.896,31.003 41.972,30.927 42.407,30.927 v1(42.451,30.883)
NetR6_2: R6.2 U2.16 | length 1.7
  Top w0.152: U2.16 R6.2
NetR8_1: R8.1 U3.4 | length 3.2
  Top w0.152: R8.1 26.384,1.607 26.793,2.016 U3.4
NetR12_1: R12.1 U2.19 | length 8.4
  Top w0.152: U2.19 29.955,27.045 33.336,30.426 35.006,30.426 R12.1@35.805,31.225
NetR14_1: R14.1 U2.20 | length 7.2
  Top w0.152: U2.20 28.685,26.7 30.785,28.8 31.315,28.8 33,30.485 R14.1
RST_PIN: J2.3 U2.35 | length 20.9
  Top w0.152: U2.35 19.33,14.75 22.7,14.75 25.455,17.505 25.455,18.88 v1(22.335,22) ; v1(22.95,27.779) J2.3
  Bottom w0.152: v1(22.335,22) 22.95,22.615 v1(22.95,27.779)
SD_CS: J2.19 U2.33 | length 20.8
  Top w0.152: U2.33 24.236,17.32 v1(24.255,17.301) ; v1(29.315,28.56) 29.341,28.586 29.341,29.491 J2.19
  Bottom w0.152: v1(24.255,17.301) 24.273,17.283 26.905,17.283 29.315,19.694 v1(29.315,28.56)
SPI_CS: J2.2 U2.18 | length 18.1
  Top w0.152: J2.2 22.55,28.21 21.84,27.5 20.636,27.5 20.15,27.014 20.15,25.666 20.164,25.666 20.326,25.504 20.326,25.146 20.5,24.972 30.897,24.972 31.225,25.3 U2.18
SPI_MISO: J2.15 U2.21 | length 9.9
  Top w0.152: U2.21 27.415,27.165 27.75,27.5 29.075,27.5 29.597,28.022 29.955,28.38 29.955,30.395 29.125,31.225 28.375,31.225 27.75,30.6 J2.15
SPI_MOSI: J2.8 R12.2 | length 15.6
  Top w0.152: J2.8 24.941,29.509 24.941,32.827 25.864,33.75 35.49,33.75 35.805,33.435 R12.2
SPI_SCK: J2.11 R14.2 | length 10.6
  Top w0.152: J2.11 26.15,32.395 26.15,32.71 26.697,33.257 32.303,33.257 R14.2
T_CS: J2.17 U2.22 | length 5
  Top w0.152: U2.22 26.145,27.095 26.829,27.779 28.019,27.779 28.55,28.31 J2.17
USB.USB_N: D1.6 U2.13 | length 3.5
  Top w0.152: U2.13 39.737,23.67 D1.6
USB.USB_P: D1.4 U2.14 | length 3.4
  Top w0.152: U2.14 39.471,24.94 39.557,25.025 40.092,25.025 D1.4
VBUS: C8.2 D1.5 D2.2 J1.A4/B9 J1.B4/A9 | length 2.8
  Top w0.152: D1.5 40.219,24.652 40.219,24.673 40.775,24.673 40.937,24.835 40.937,25.364 40.775,25.525 40.219,25.525 v1(40.219,26.128)
pads on no net: J1. J1.A8 J1.B8 MT1.2 MT1.3 MT1.10 MT1.11 U2.4 U2.9 U2.15 U2.23 U2.24 U2.25 U2.26 U2.28 U2.29 U2.30 U2.36 U2.37 U3.3

## Polygon pours and split planes (outlines as drawn)
GND on Bottom "GND_L02_P002" (solid, remove dead copper, pour order 2): 0,0 0,36.25 53,36.25 53,0
3V3 on Top "3V3_L01_P010" (solid, remove dead copper, pour order 10): 0,0 0,36.25 53,36.25 53,0.204 52.796,0
VBUS on Top "VBUS_L01_P004" (solid, pour order 4): 38.384,30.129 51,30.129 51,22.073 50.986,22.059 38.301,22.059
5V0 on Top "Top-5V0" (solid, pour order 6): 13.778,7.84 18.27,7.84 18.27,13.823 25.779,13.838 25.75,13.867 25.75,36.05 5.886,36.05 5.8,35.964 5.8,13.797 13.778,13.814
GND on Top "GND_L01_P007" (solid, pour order 7): 27.573,18.127 31.527,18.127 31.527,14.173 27.573,14.173
NetJ1_1 on Top "NETJ1_1_L01_P009" (solid, pour order 9): 49.638,35.999 50.75,34.888 50.75,30.294 38.384,30.294 38.344,30.334 38.344,35.976

## Silkscreen, mask and mechanical layers (free items; w line width, h text height)
Top Overlay:
  text "Screen" at 19.438,29.474 h1.5 r90
  text "5V" at 1.984,23.32 h1.1
  text "JLCJLCJLCJLC" at 24.3,21.553 h0.8
  text "3V3" at 1.984,11.52 h1.1
  text "GND" at 37.998,4.705 h1.2
  text "ACC_INT1" at 47.058,4.555 h1.1 r90
  text "ACC_INT2" at 49.565,4.555 h1.1 r90
Bottom Overlay:
  text ".Projet_Titre" at 17.503,35.78 h3.5 r90
  text "0" at 9.66,33.166 h3.5 r90
  text ".Projet_nom_du_cours" at 39.616,29.387 h2
  text "BOOT" at 21.259,26.269 h1.1
  text ".Projet_Concepteur2" at 28.75,25.089 h2 r90
  text ".Projet_Concepteur1" at 25.699,24.972 h2 r90
  text "GND" at 21.259,24.143 h1.1
  text ".Projet_Date" at 31.75,23.5 h0.91 r90
  text "Conçu par :" at 20.5,22.75 h2 r90
  text "RESET" at 43.566,18.612 h1.1
  text "RX" at 43.294,13.643 h1.1
  text "5V" at 19.58,12.656 h1.1 r90
  text "TX" at 43.294,11.144 h1.1
Board Outline:
  the board outline again, w0.254

## Text inside footprints (layer, text, board x,y; h text height)
J2: Bottom Assembly "PCB Edge" at 27.581,36.956 h0.61 r180
REV1: Bottom Overlay "PCB REV #" at 34.1,24.374 h1 r90
SER1: Bottom Overlay "SERIAL #" at 33.858,18.479 h1 r90
STENCIL1: Top Paste "TOP" at 76.88,-124.792 h4; Top Paste "181 MM" at 9.932,153.208 h1.78; Top Paste "280 MM" at -73.12,4.208 h1.78 r90; Top Paste "STENCIL THICKNESS -" at -55.677,-148.092 h6.5; Top Paste "PCB Revision" at -25.111,-122.463 h2